# EAGLE board SparkFun_Thermocouple_Breakout-Panel (EAGLE 9.6.2), part 1 of 2
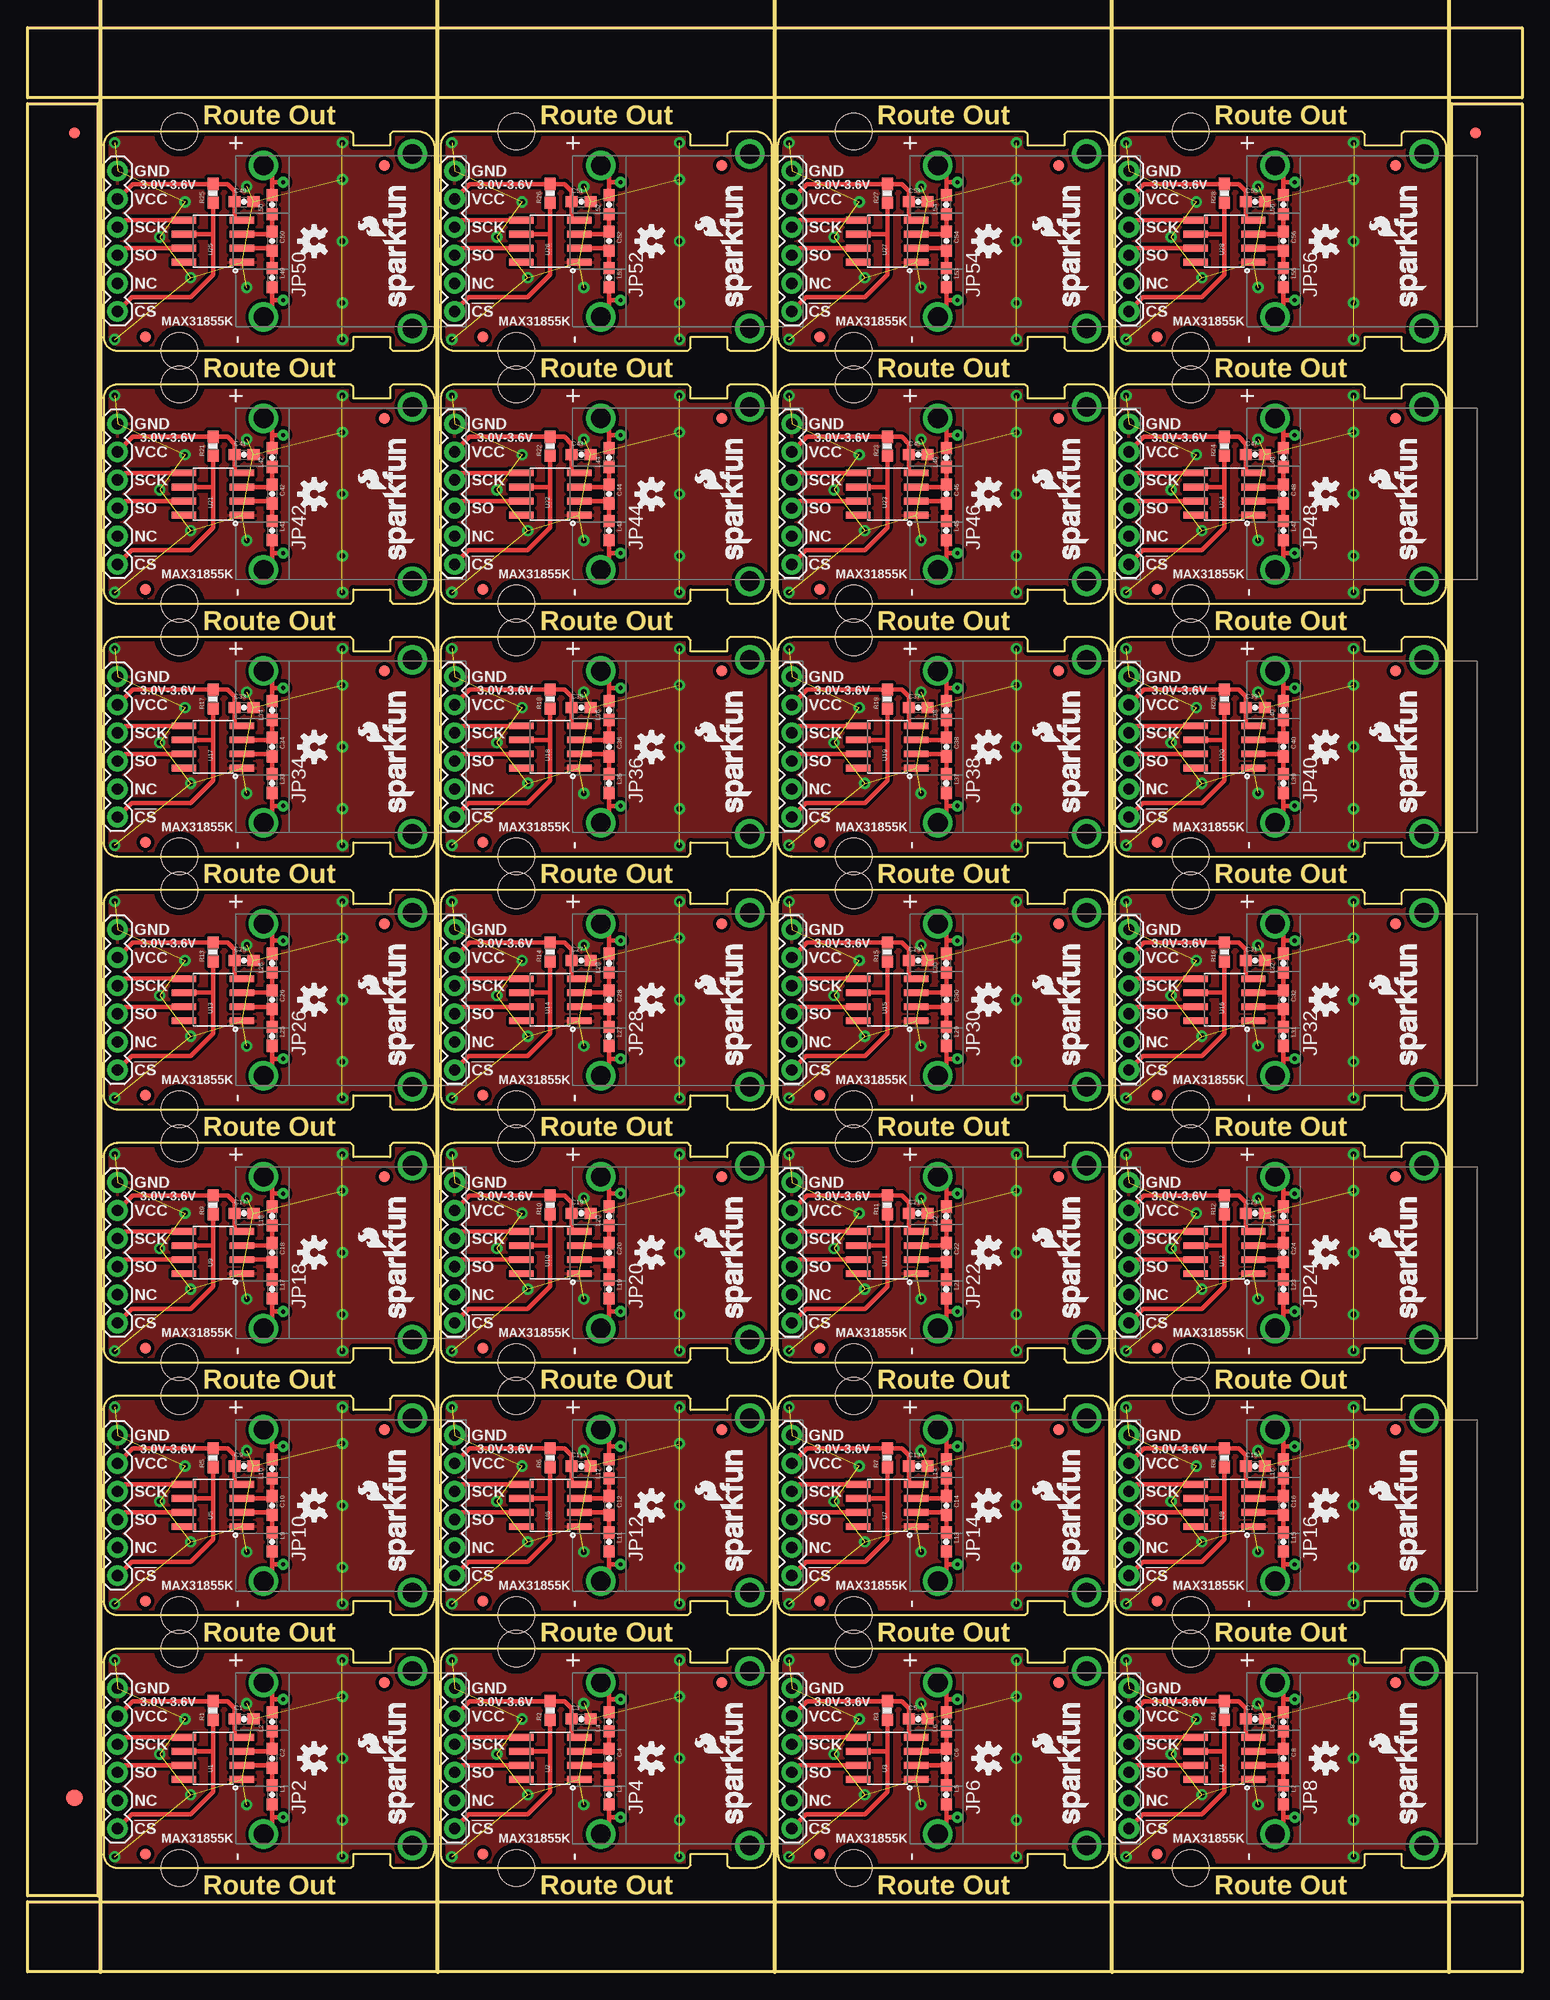
[diagram p0: board, top side]
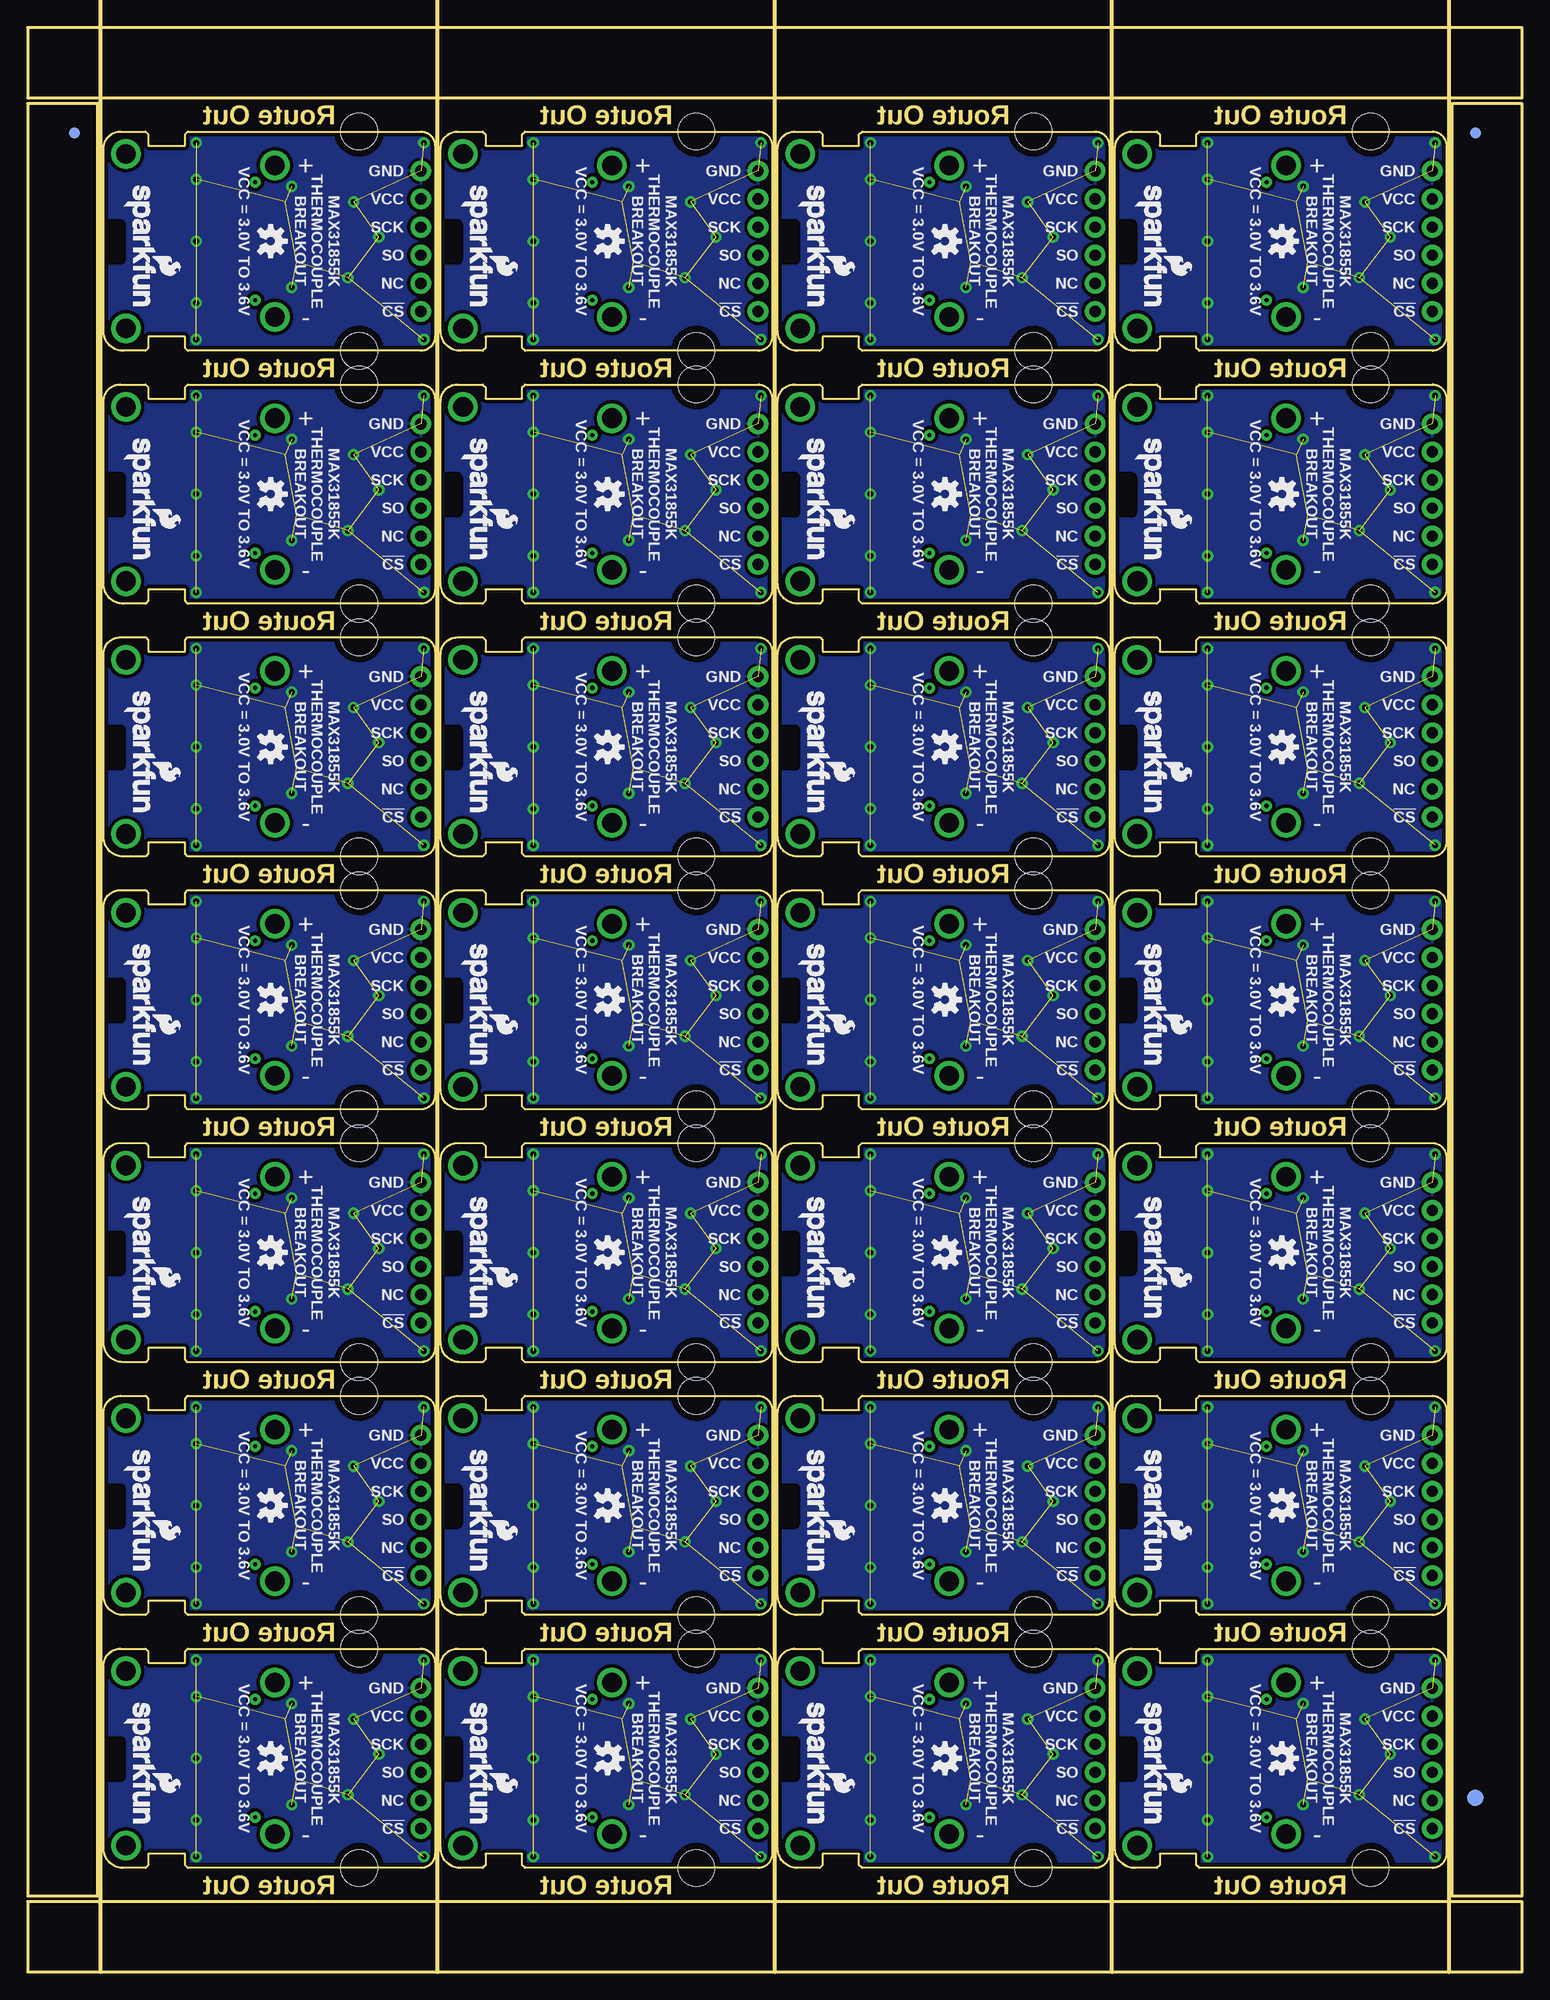
[diagram p1: board, bottom side, seen from below]

Size 135.13 x 175.77 mm. Coordinates in mm from the lower left corner, seen from the top.
Outline: 576 segments
Copper layers (1*16): Top 0.035mm / dielectric 1.5mm / Bottom 0.035mm
Design rules "SparkFun_Thermocouple_Breakout": minimum track width 7mil, minimum drill 15mil, track to track 8mil, track to pad 8mil, pad to pad 8mil, via to via 8mil, smd to smd 8mil, copper to edge 8mil, drill to drill 8mil, minimum pad ring 12mil, minimum via ring 10mil, stop-mask expansion 4mil, vias tented up to drill 20mil, thermal gap 10mil
tRestrict: area 19.6,17.8 to 20.1,18.3; area 50,17.8 to 50.5,18.3; area 80.5,17.8 to 81,18.3; area 111,17.8 to 111.5,18.3; area 19.6,40.6 to 20.1,41.1; area 50,40.6 to 50.5,41.1; area 80.5,40.6 to 81,41.1; area 111,40.6 to 111.5,41.1; area 19.6,63.5 to 20.1,64; area 50,63.5 to 50.5,64; area 80.5,63.5 to 81,64; area 111,63.5 to 111.5,64; 16 more areas
bRestrict: area 35.3,17.7 to 36.8,20.8; area 65.8,17.7 to 67.3,20.8; area 96.3,17.7 to 97.8,20.8; area 126.7,17.7 to 128.3,20.8; area 35.3,40.5 to 36.8,43.7; area 65.8,40.5 to 67.3,43.7; area 96.3,40.5 to 97.8,43.7; area 126.7,40.5 to 128.3,43.7; area 35.3,63.4 to 36.8,66.5; area 65.8,63.4 to 67.3,66.5; area 96.3,63.4 to 97.8,66.5; area 126.7,63.4 to 128.3,66.5; 16 more areas
Milling: 5 lines

## Footprints (pad centres in the part's own frame; a part is rotated, then mirrored left to right if it is on the bottom)
0603-CAP = smd 1.1 x 1: 1 -0.85,0; 2 0.85,0
FIDUCIAL-1X2 = smd 1 x 1: 1 0,0
FIDUCIAL-1.5X3 = smd 1.5 x 1.5: 1 0,0
1X06 = drill 1.016 pad 1.88: 1 0,0; 2 2.54,0; 3 5.08,0; 4 7.62,0; 5 10.16,0; 6 12.7,0
PCC-SMP = drill 1.778: + 6.858,0; - -6.858,0; CLIP1 -7.874,-13.462; CLIP2 7.874,-13.462
0603 = smd 1.1 x 1: 1 -0.85,0; 2 0.85,0
0603-RES = smd 1.1 x 1: 1 -0.85,0; 2 0.85,0
STAND-OFF = hole 3.302: 0,0
TP_15TH = drill 0.381 pad 0.61: P$1 0,0
SOIC8 = smd 0.61 x 2.21: 1 -1.905,-2.616; 2 -0.635,-2.616; 3 0.635,-2.616; 4 1.905,-2.616; 5 1.905,2.616; 6 0.635,2.616; 7 -0.635,2.616; 8 -1.905,2.616

## Placement (x,y rotation side)
C1  0.1uF  [0603-CAP]  19.56,22.86 0 top
C2  10nF  [0603-CAP]  22.1,19.3 270 top
C3  0.1uF  [0603-CAP]  50.04,22.86 0 top
C4  10nF  [0603-CAP]  52.58,19.3 270 top
C5  0.1uF  [0603-CAP]  80.52,22.86 0 top
C6  10nF  [0603-CAP]  83.06,19.3 270 top
C7  0.1uF  [0603-CAP]  111,22.86 0 top
C8  10nF  [0603-CAP]  113.54,19.3 270 top
C9  0.1uF  [0603-CAP]  19.56,45.72 0 top
C10  10nF  [0603-CAP]  22.1,42.16 270 top
C11  0.1uF  [0603-CAP]  50.04,45.72 0 top
C12  10nF  [0603-CAP]  52.58,42.16 270 top
C13  0.1uF  [0603-CAP]  80.52,45.72 0 top
C14  10nF  [0603-CAP]  83.06,42.16 270 top
C15  0.1uF  [0603-CAP]  111,45.72 0 top
C16  10nF  [0603-CAP]  113.54,42.16 270 top
C17  0.1uF  [0603-CAP]  19.56,68.58 0 top
C18  10nF  [0603-CAP]  22.1,65.02 270 top
C19  0.1uF  [0603-CAP]  50.04,68.58 0 top
C20  10nF  [0603-CAP]  52.58,65.02 270 top
C21  0.1uF  [0603-CAP]  80.52,68.58 0 top
C22  10nF  [0603-CAP]  83.06,65.02 270 top
C23  0.1uF  [0603-CAP]  111,68.58 0 top
C24  10nF  [0603-CAP]  113.54,65.02 270 top
C25  0.1uF  [0603-CAP]  19.56,91.44 0 top
C26  10nF  [0603-CAP]  22.1,87.88 270 top
C27  0.1uF  [0603-CAP]  50.04,91.44 0 top
C28  10nF  [0603-CAP]  52.58,87.88 270 top
C29  0.1uF  [0603-CAP]  80.52,91.44 0 top
C30  10nF  [0603-CAP]  83.06,87.88 270 top
C31  0.1uF  [0603-CAP]  111,91.44 0 top
C32  10nF  [0603-CAP]  113.54,87.88 270 top
C33  0.1uF  [0603-CAP]  19.56,114.3 0 top
C34  10nF  [0603-CAP]  22.1,110.74 270 top
C35  0.1uF  [0603-CAP]  50.04,114.3 0 top
C36  10nF  [0603-CAP]  52.58,110.74 270 top
C37  0.1uF  [0603-CAP]  80.52,114.3 0 top
C38  10nF  [0603-CAP]  83.06,110.74 270 top
C39  0.1uF  [0603-CAP]  111,114.3 0 top
C40  10nF  [0603-CAP]  113.54,110.74 270 top
C41  0.1uF  [0603-CAP]  19.56,137.16 0 top
C42  10nF  [0603-CAP]  22.1,133.6 270 top
C43  0.1uF  [0603-CAP]  50.04,137.16 0 top
C44  10nF  [0603-CAP]  52.58,133.6 270 top
C45  0.1uF  [0603-CAP]  80.52,137.16 0 top
C46  10nF  [0603-CAP]  83.06,133.6 270 top
C47  0.1uF  [0603-CAP]  111,137.16 0 top
C48  10nF  [0603-CAP]  113.54,133.6 270 top
C49  0.1uF  [0603-CAP]  19.56,160.02 0 top
C50  10nF  [0603-CAP]  22.1,156.46 270 top
C51  0.1uF  [0603-CAP]  50.04,160.02 0 top
C52  10nF  [0603-CAP]  52.58,156.46 270 top
C53  0.1uF  [0603-CAP]  80.52,160.02 0 top
C54  10nF  [0603-CAP]  83.06,156.46 270 top
C55  0.1uF  [0603-CAP]  111,160.02 0 top
C56  10nF  [0603-CAP]  113.54,156.46 270 top
E$1  [FIDUCIAL-1X2]  4.23,166.24 0 top
E$2  [FIDUCIAL-1X2]  4.23,166.24 0 bottom
E$3  [FIDUCIAL-1X2]  130.89,166.24 0 top
E$4  [FIDUCIAL-1X2]  130.89,166.24 0 bottom
E$5  [FIDUCIAL-1.5X3]  4.23,15.75 0 top
E$6  [FIDUCIAL-1.5X3]  4.23,15.75 0 bottom
FID1  FIDUCIAL1X2  [FIDUCIAL-1X2]  32.26,26.16 0 top
FID2  FIDUCIAL1X2  [FIDUCIAL-1X2]  10.67,10.67 0 top
FID3  FIDUCIAL1X2  [FIDUCIAL-1X2]  62.74,26.16 0 top
FID4  FIDUCIAL1X2  [FIDUCIAL-1X2]  41.15,10.67 0 top
FID5  FIDUCIAL1X2  [FIDUCIAL-1X2]  93.22,26.16 0 top
FID6  FIDUCIAL1X2  [FIDUCIAL-1X2]  71.63,10.67 0 top
FID7  FIDUCIAL1X2  [FIDUCIAL-1X2]  123.7,26.16 0 top
FID8  FIDUCIAL1X2  [FIDUCIAL-1X2]  102.11,10.67 0 top
FID9  FIDUCIAL1X2  [FIDUCIAL-1X2]  32.26,49.02 0 top
FID10  FIDUCIAL1X2  [FIDUCIAL-1X2]  10.67,33.53 0 top
FID11  FIDUCIAL1X2  [FIDUCIAL-1X2]  62.74,49.02 0 top
FID12  FIDUCIAL1X2  [FIDUCIAL-1X2]  41.15,33.53 0 top
FID13  FIDUCIAL1X2  [FIDUCIAL-1X2]  93.22,49.02 0 top
FID14  FIDUCIAL1X2  [FIDUCIAL-1X2]  71.63,33.53 0 top
FID15  FIDUCIAL1X2  [FIDUCIAL-1X2]  123.7,49.02 0 top
FID16  FIDUCIAL1X2  [FIDUCIAL-1X2]  102.11,33.53 0 top
FID17  FIDUCIAL1X2  [FIDUCIAL-1X2]  32.26,71.88 0 top
FID18  FIDUCIAL1X2  [FIDUCIAL-1X2]  10.67,56.39 0 top
FID19  FIDUCIAL1X2  [FIDUCIAL-1X2]  62.74,71.88 0 top
FID20  FIDUCIAL1X2  [FIDUCIAL-1X2]  41.15,56.39 0 top
FID21  FIDUCIAL1X2  [FIDUCIAL-1X2]  93.22,71.88 0 top
FID22  FIDUCIAL1X2  [FIDUCIAL-1X2]  71.63,56.39 0 top
FID23  FIDUCIAL1X2  [FIDUCIAL-1X2]  123.7,71.88 0 top
FID24  FIDUCIAL1X2  [FIDUCIAL-1X2]  102.11,56.39 0 top
FID25  FIDUCIAL1X2  [FIDUCIAL-1X2]  32.26,94.74 0 top
FID26  FIDUCIAL1X2  [FIDUCIAL-1X2]  10.67,79.25 0 top
FID27  FIDUCIAL1X2  [FIDUCIAL-1X2]  62.74,94.74 0 top
FID28  FIDUCIAL1X2  [FIDUCIAL-1X2]  41.15,79.25 0 top
FID29  FIDUCIAL1X2  [FIDUCIAL-1X2]  93.22,94.74 0 top
FID30  FIDUCIAL1X2  [FIDUCIAL-1X2]  71.63,79.25 0 top
FID31  FIDUCIAL1X2  [FIDUCIAL-1X2]  123.7,94.74 0 top
FID32  FIDUCIAL1X2  [FIDUCIAL-1X2]  102.11,79.25 0 top
FID33  FIDUCIAL1X2  [FIDUCIAL-1X2]  32.26,117.6 0 top
FID34  FIDUCIAL1X2  [FIDUCIAL-1X2]  10.67,102.11 0 top
FID35  FIDUCIAL1X2  [FIDUCIAL-1X2]  62.74,117.6 0 top
FID36  FIDUCIAL1X2  [FIDUCIAL-1X2]  41.15,102.11 0 top
FID37  FIDUCIAL1X2  [FIDUCIAL-1X2]  93.22,117.6 0 top
FID38  FIDUCIAL1X2  [FIDUCIAL-1X2]  71.63,102.11 0 top
FID39  FIDUCIAL1X2  [FIDUCIAL-1X2]  123.7,117.6 0 top
FID40  FIDUCIAL1X2  [FIDUCIAL-1X2]  102.11,102.11 0 top
FID41  FIDUCIAL1X2  [FIDUCIAL-1X2]  32.26,140.46 0 top
FID42  FIDUCIAL1X2  [FIDUCIAL-1X2]  10.67,124.97 0 top
FID43  FIDUCIAL1X2  [FIDUCIAL-1X2]  62.74,140.46 0 top
FID44  FIDUCIAL1X2  [FIDUCIAL-1X2]  41.15,124.97 0 top
FID45  FIDUCIAL1X2  [FIDUCIAL-1X2]  93.22,140.46 0 top
FID46  FIDUCIAL1X2  [FIDUCIAL-1X2]  71.63,124.97 0 top
FID47  FIDUCIAL1X2  [FIDUCIAL-1X2]  123.7,140.46 0 top
FID48  FIDUCIAL1X2  [FIDUCIAL-1X2]  102.11,124.97 0 top
FID49  FIDUCIAL1X2  [FIDUCIAL-1X2]  32.26,163.32 0 top
FID50  FIDUCIAL1X2  [FIDUCIAL-1X2]  10.67,147.83 0 top
FID51  FIDUCIAL1X2  [FIDUCIAL-1X2]  62.74,163.32 0 top
FID52  FIDUCIAL1X2  [FIDUCIAL-1X2]  41.15,147.83 0 top
FID53  FIDUCIAL1X2  [FIDUCIAL-1X2]  93.22,163.32 0 top
FID54  FIDUCIAL1X2  [FIDUCIAL-1X2]  71.63,147.83 0 top
FID55  FIDUCIAL1X2  [FIDUCIAL-1X2]  123.7,163.32 0 top
FID56  FIDUCIAL1X2  [FIDUCIAL-1X2]  102.11,147.83 0 top
JP1  DNP  [1X06]  8.13,25.65 270 top
JP2  PCB_THERMOCOUPLE  [PCC-SMP]  21.34,19.3 90 top
JP3  DNP  [1X06]  38.61,25.65 270 top
JP4  PCB_THERMOCOUPLE  [PCC-SMP]  51.82,19.3 90 top
JP5  DNP  [1X06]  69.09,25.65 270 top
JP6  PCB_THERMOCOUPLE  [PCC-SMP]  82.3,19.3 90 top
JP7  DNP  [1X06]  99.57,25.65 270 top
JP8  PCB_THERMOCOUPLE  [PCC-SMP]  112.78,19.3 90 top
JP9  DNP  [1X06]  8.13,48.51 270 top
JP10  PCB_THERMOCOUPLE  [PCC-SMP]  21.34,42.16 90 top
JP11  DNP  [1X06]  38.61,48.51 270 top
JP12  PCB_THERMOCOUPLE  [PCC-SMP]  51.82,42.16 90 top
JP13  DNP  [1X06]  69.09,48.51 270 top
JP14  PCB_THERMOCOUPLE  [PCC-SMP]  82.3,42.16 90 top
JP15  DNP  [1X06]  99.57,48.51 270 top
JP16  PCB_THERMOCOUPLE  [PCC-SMP]  112.78,42.16 90 top
JP17  DNP  [1X06]  8.13,71.37 270 top
JP18  PCB_THERMOCOUPLE  [PCC-SMP]  21.34,65.02 90 top
JP19  DNP  [1X06]  38.61,71.37 270 top
JP20  PCB_THERMOCOUPLE  [PCC-SMP]  51.82,65.02 90 top
JP21  DNP  [1X06]  69.09,71.37 270 top
JP22  PCB_THERMOCOUPLE  [PCC-SMP]  82.3,65.02 90 top
JP23  DNP  [1X06]  99.57,71.37 270 top
JP24  PCB_THERMOCOUPLE  [PCC-SMP]  112.78,65.02 90 top
JP25  DNP  [1X06]  8.13,94.23 270 top
JP26  PCB_THERMOCOUPLE  [PCC-SMP]  21.34,87.88 90 top
JP27  DNP  [1X06]  38.61,94.23 270 top
JP28  PCB_THERMOCOUPLE  [PCC-SMP]  51.82,87.88 90 top
JP29  DNP  [1X06]  69.09,94.23 270 top
JP30  PCB_THERMOCOUPLE  [PCC-SMP]  82.3,87.88 90 top
JP31  DNP  [1X06]  99.57,94.23 270 top
JP32  PCB_THERMOCOUPLE  [PCC-SMP]  112.78,87.88 90 top
JP33  DNP  [1X06]  8.13,117.09 270 top
JP34  PCB_THERMOCOUPLE  [PCC-SMP]  21.34,110.74 90 top
JP35  DNP  [1X06]  38.61,117.09 270 top
JP36  PCB_THERMOCOUPLE  [PCC-SMP]  51.82,110.74 90 top
JP37  DNP  [1X06]  69.09,117.09 270 top
JP38  PCB_THERMOCOUPLE  [PCC-SMP]  82.3,110.74 90 top
JP39  DNP  [1X06]  99.57,117.09 270 top
JP40  PCB_THERMOCOUPLE  [PCC-SMP]  112.78,110.74 90 top
JP41  DNP  [1X06]  8.13,139.95 270 top
JP42  PCB_THERMOCOUPLE  [PCC-SMP]  21.34,133.6 90 top
JP43  DNP  [1X06]  38.61,139.95 270 top
JP44  PCB_THERMOCOUPLE  [PCC-SMP]  51.82,133.6 90 top
JP45  DNP  [1X06]  69.09,139.95 270 top
JP46  PCB_THERMOCOUPLE  [PCC-SMP]  82.3,133.6 90 top
JP47  DNP  [1X06]  99.57,139.95 270 top
JP48  PCB_THERMOCOUPLE  [PCC-SMP]  112.78,133.6 90 top
JP49  DNP  [1X06]  8.13,162.81 270 top
JP50  PCB_THERMOCOUPLE  [PCC-SMP]  21.34,156.46 90 top
JP51  DNP  [1X06]  38.61,162.81 270 top
JP52  PCB_THERMOCOUPLE  [PCC-SMP]  51.82,156.46 90 top
JP53  DNP  [1X06]  69.09,162.81 270 top
JP54  PCB_THERMOCOUPLE  [PCC-SMP]  82.3,156.46 90 top
JP55  DNP  [1X06]  99.57,162.81 270 top
JP56  PCB_THERMOCOUPLE  [PCC-SMP]  112.78,156.46 90 top
L1  470OHM  [0603]  22.1,16 270 top
L2  470OHM  [0603]  22.1,22.61 90 top
L3  470OHM  [0603]  52.58,16 270 top
L4  470OHM  [0603]  52.58,22.61 90 top
L5  470OHM  [0603]  83.06,16 270 top
L6  470OHM  [0603]  83.06,22.61 90 top
L7  470OHM  [0603]  113.54,16 270 top
L8  470OHM  [0603]  113.54,22.61 90 top
L9  470OHM  [0603]  22.1,38.86 270 top
L10  470OHM  [0603]  22.1,45.47 90 top
L11  470OHM  [0603]  52.58,38.86 270 top
L12  470OHM  [0603]  52.58,45.47 90 top
L13  470OHM  [0603]  83.06,38.86 270 top
L14  470OHM  [0603]  83.06,45.47 90 top
L15  470OHM  [0603]  113.54,38.86 270 top
L16  470OHM  [0603]  113.54,45.47 90 top
L17  470OHM  [0603]  22.1,61.72 270 top
L18  470OHM  [0603]  22.1,68.33 90 top
L19  470OHM  [0603]  52.58,61.72 270 top
L20  470OHM  [0603]  52.58,68.33 90 top
L21  470OHM  [0603]  83.06,61.72 270 top
L22  470OHM  [0603]  83.06,68.33 90 top
L23  470OHM  [0603]  113.54,61.72 270 top
L24  470OHM  [0603]  113.54,68.33 90 top
L25  470OHM  [0603]  22.1,84.58 270 top
L26  470OHM  [0603]  22.1,91.19 90 top
L27  470OHM  [0603]  52.58,84.58 270 top
L28  470OHM  [0603]  52.58,91.19 90 top
L29  470OHM  [0603]  83.06,84.58 270 top
L30  470OHM  [0603]  83.06,91.19 90 top
L31  470OHM  [0603]  113.54,84.58 270 top
L32  470OHM  [0603]  113.54,91.19 90 top
L33  470OHM  [0603]  22.1,107.44 270 top
L34  470OHM  [0603]  22.1,114.05 90 top
L35  470OHM  [0603]  52.58,107.44 270 top
L36  470OHM  [0603]  52.58,114.05 90 top
L37  470OHM  [0603]  83.06,107.44 270 top
L38  470OHM  [0603]  83.06,114.05 90 top
L39  470OHM  [0603]  113.54,107.44 270 top
L40  470OHM  [0603]  113.54,114.05 90 top
L41  470OHM  [0603]  22.1,130.3 270 top
L42  470OHM  [0603]  22.1,136.91 90 top
L43  470OHM  [0603]  52.58,130.3 270 top
L44  470OHM  [0603]  52.58,136.91 90 top
L45  470OHM  [0603]  83.06,130.3 270 top
L46  470OHM  [0603]  83.06,136.91 90 top
L47  470OHM  [0603]  113.54,130.3 270 top
L48  470OHM  [0603]  113.54,136.91 90 top
L49  470OHM  [0603]  22.1,153.16 270 top
L50  470OHM  [0603]  22.1,159.77 90 top
L51  470OHM  [0603]  52.58,153.16 270 top
L52  470OHM  [0603]  52.58,159.77 90 top
L53  470OHM  [0603]  83.06,153.16 270 top
L54  470OHM  [0603]  83.06,159.77 90 top
L55  470OHM  [0603]  113.54,153.16 270 top
L56  470OHM  [0603]  113.54,159.77 90 top
LOGO1  OSHW-LOGOS  [OSHW-LOGO-S]  25.91,19.3 90 top
LOGO2  SFE_LOGO_NAME_FLAME.1_INCH  [SFE_LOGO_NAME_FLAME_.1]  35.05,12.95 90 top
LOGO3  SFE_LOGO_NAME_FLAME.1_INCH  [SFE_LOGO_NAME_FLAME_.1]  35.05,24.77 270 bottom
LOGO4  OSHW-LOGOS  [OSHW-LOGO-S]  21.72,19.3 270 bottom
LOGO5  SFE_LOGO_NAME_FLAME.1_INCH  [SFE_LOGO_NAME_FLAME_.1]  65.53,12.95 90 top
LOGO6  OSHW-LOGOS  [OSHW-LOGO-S]  56.39,19.3 90 top
LOGO7  SFE_LOGO_NAME_FLAME.1_INCH  [SFE_LOGO_NAME_FLAME_.1]  65.53,24.77 270 bottom
LOGO8  OSHW-LOGOS  [OSHW-LOGO-S]  52.2,19.3 270 bottom
LOGO9  SFE_LOGO_NAME_FLAME.1_INCH  [SFE_LOGO_NAME_FLAME_.1]  96.01,12.95 90 top
LOGO10  OSHW-LOGOS  [OSHW-LOGO-S]  86.87,19.3 90 top
LOGO11  SFE_LOGO_NAME_FLAME.1_INCH  [SFE_LOGO_NAME_FLAME_.1]  96.01,24.77 270 bottom
LOGO12  OSHW-LOGOS  [OSHW-LOGO-S]  82.68,19.3 270 bottom
LOGO13  SFE_LOGO_NAME_FLAME.1_INCH  [SFE_LOGO_NAME_FLAME_.1]  126.49,12.95 90 top
LOGO14  OSHW-LOGOS  [OSHW-LOGO-S]  117.35,19.3 90 top
LOGO15  SFE_LOGO_NAME_FLAME.1_INCH  [SFE_LOGO_NAME_FLAME_.1]  126.49,24.77 270 bottom
LOGO16  OSHW-LOGOS  [OSHW-LOGO-S]  113.16,19.3 270 bottom
LOGO17  SFE_LOGO_NAME_FLAME.1_INCH  [SFE_LOGO_NAME_FLAME_.1]  35.05,35.81 90 top
LOGO18  OSHW-LOGOS  [OSHW-LOGO-S]  25.91,42.16 90 top
LOGO19  SFE_LOGO_NAME_FLAME.1_INCH  [SFE_LOGO_NAME_FLAME_.1]  35.05,47.62 270 bottom
LOGO20  OSHW-LOGOS  [OSHW-LOGO-S]  21.72,42.16 270 bottom
LOGO21  SFE_LOGO_NAME_FLAME.1_INCH  [SFE_LOGO_NAME_FLAME_.1]  65.53,35.81 90 top
LOGO22  OSHW-LOGOS  [OSHW-LOGO-S]  56.39,42.16 90 top
LOGO23  SFE_LOGO_NAME_FLAME.1_INCH  [SFE_LOGO_NAME_FLAME_.1]  65.53,47.62 270 bottom
LOGO24  OSHW-LOGOS  [OSHW-LOGO-S]  52.2,42.16 270 bottom
LOGO25  SFE_LOGO_NAME_FLAME.1_INCH  [SFE_LOGO_NAME_FLAME_.1]  96.01,35.81 90 top
LOGO26  OSHW-LOGOS  [OSHW-LOGO-S]  86.87,42.16 90 top
LOGO27  SFE_LOGO_NAME_FLAME.1_INCH  [SFE_LOGO_NAME_FLAME_.1]  96.01,47.62 270 bottom
LOGO28  OSHW-LOGOS  [OSHW-LOGO-S]  82.68,42.16 270 bottom
LOGO29  SFE_LOGO_NAME_FLAME.1_INCH  [SFE_LOGO_NAME_FLAME_.1]  126.49,35.81 90 top
LOGO30  OSHW-LOGOS  [OSHW-LOGO-S]  117.35,42.16 90 top
LOGO31  SFE_LOGO_NAME_FLAME.1_INCH  [SFE_LOGO_NAME_FLAME_.1]  126.49,47.62 270 bottom
LOGO32  OSHW-LOGOS  [OSHW-LOGO-S]  113.16,42.16 270 bottom
LOGO33  SFE_LOGO_NAME_FLAME.1_INCH  [SFE_LOGO_NAME_FLAME_.1]  35.05,58.67 90 top
LOGO34  OSHW-LOGOS  [OSHW-LOGO-S]  25.91,65.02 90 top
LOGO35  SFE_LOGO_NAME_FLAME.1_INCH  [SFE_LOGO_NAME_FLAME_.1]  35.05,70.48 270 bottom
LOGO36  OSHW-LOGOS  [OSHW-LOGO-S]  21.72,65.02 270 bottom
LOGO37  SFE_LOGO_NAME_FLAME.1_INCH  [SFE_LOGO_NAME_FLAME_.1]  65.53,58.67 90 top
LOGO38  OSHW-LOGOS  [OSHW-LOGO-S]  56.39,65.02 90 top
LOGO39  SFE_LOGO_NAME_FLAME.1_INCH  [SFE_LOGO_NAME_FLAME_.1]  65.53,70.48 270 bottom
LOGO40  OSHW-LOGOS  [OSHW-LOGO-S]  52.2,65.02 270 bottom
LOGO41  SFE_LOGO_NAME_FLAME.1_INCH  [SFE_LOGO_NAME_FLAME_.1]  96.01,58.67 90 top
LOGO42  OSHW-LOGOS  [OSHW-LOGO-S]  86.87,65.02 90 top
LOGO43  SFE_LOGO_NAME_FLAME.1_INCH  [SFE_LOGO_NAME_FLAME_.1]  96.01,70.48 270 bottom
LOGO44  OSHW-LOGOS  [OSHW-LOGO-S]  82.68,65.02 270 bottom
LOGO45  SFE_LOGO_NAME_FLAME.1_INCH  [SFE_LOGO_NAME_FLAME_.1]  126.49,58.67 90 top
LOGO46  OSHW-LOGOS  [OSHW-LOGO-S]  117.35,65.02 90 top
LOGO47  SFE_LOGO_NAME_FLAME.1_INCH  [SFE_LOGO_NAME_FLAME_.1]  126.49,70.48 270 bottom
LOGO48  OSHW-LOGOS  [OSHW-LOGO-S]  113.16,65.02 270 bottom
LOGO49  SFE_LOGO_NAME_FLAME.1_INCH  [SFE_LOGO_NAME_FLAME_.1]  35.05,81.53 90 top
LOGO50  OSHW-LOGOS  [OSHW-LOGO-S]  25.91,87.88 90 top
LOGO51  SFE_LOGO_NAME_FLAME.1_INCH  [SFE_LOGO_NAME_FLAME_.1]  35.05,93.34 270 bottom
LOGO52  OSHW-LOGOS  [OSHW-LOGO-S]  21.72,87.88 270 bottom
LOGO53  SFE_LOGO_NAME_FLAME.1_INCH  [SFE_LOGO_NAME_FLAME_.1]  65.53,81.53 90 top
LOGO54  OSHW-LOGOS  [OSHW-LOGO-S]  56.39,87.88 90 top
LOGO55  SFE_LOGO_NAME_FLAME.1_INCH  [SFE_LOGO_NAME_FLAME_.1]  65.53,93.34 270 bottom
LOGO56  OSHW-LOGOS  [OSHW-LOGO-S]  52.2,87.88 270 bottom
LOGO57  SFE_LOGO_NAME_FLAME.1_INCH  [SFE_LOGO_NAME_FLAME_.1]  96.01,81.53 90 top
LOGO58  OSHW-LOGOS  [OSHW-LOGO-S]  86.87,87.88 90 top
LOGO59  SFE_LOGO_NAME_FLAME.1_INCH  [SFE_LOGO_NAME_FLAME_.1]  96.01,93.34 270 bottom
LOGO60  OSHW-LOGOS  [OSHW-LOGO-S]  82.68,87.88 270 bottom
LOGO61  SFE_LOGO_NAME_FLAME.1_INCH  [SFE_LOGO_NAME_FLAME_.1]  126.49,81.53 90 top
LOGO62  OSHW-LOGOS  [OSHW-LOGO-S]  117.35,87.88 90 top
LOGO63  SFE_LOGO_NAME_FLAME.1_INCH  [SFE_LOGO_NAME_FLAME_.1]  126.49,93.34 270 bottom
LOGO64  OSHW-LOGOS  [OSHW-LOGO-S]  113.16,87.88 270 bottom
LOGO65  SFE_LOGO_NAME_FLAME.1_INCH  [SFE_LOGO_NAME_FLAME_.1]  35.05,104.39 90 top
LOGO66  OSHW-LOGOS  [OSHW-LOGO-S]  25.91,110.74 90 top
LOGO67  SFE_LOGO_NAME_FLAME.1_INCH  [SFE_LOGO_NAME_FLAME_.1]  35.05,116.2 270 bottom
LOGO68  OSHW-LOGOS  [OSHW-LOGO-S]  21.72,110.74 270 bottom
LOGO69  SFE_LOGO_NAME_FLAME.1_INCH  [SFE_LOGO_NAME_FLAME_.1]  65.53,104.39 90 top
LOGO70  OSHW-LOGOS  [OSHW-LOGO-S]  56.39,110.74 90 top
LOGO71  SFE_LOGO_NAME_FLAME.1_INCH  [SFE_LOGO_NAME_FLAME_.1]  65.53,116.2 270 bottom
LOGO72  OSHW-LOGOS  [OSHW-LOGO-S]  52.2,110.74 270 bottom
LOGO73  SFE_LOGO_NAME_FLAME.1_INCH  [SFE_LOGO_NAME_FLAME_.1]  96.01,104.39 90 top
LOGO74  OSHW-LOGOS  [OSHW-LOGO-S]  86.87,110.74 90 top
LOGO75  SFE_LOGO_NAME_FLAME.1_INCH  [SFE_LOGO_NAME_FLAME_.1]  96.01,116.2 270 bottom
LOGO76  OSHW-LOGOS  [OSHW-LOGO-S]  82.68,110.74 270 bottom
LOGO77  SFE_LOGO_NAME_FLAME.1_INCH  [SFE_LOGO_NAME_FLAME_.1]  126.49,104.39 90 top
LOGO78  OSHW-LOGOS  [OSHW-LOGO-S]  117.35,110.74 90 top
LOGO79  SFE_LOGO_NAME_FLAME.1_INCH  [SFE_LOGO_NAME_FLAME_.1]  126.49,116.2 270 bottom
LOGO80  OSHW-LOGOS  [OSHW-LOGO-S]  113.16,110.74 270 bottom
LOGO81  SFE_LOGO_NAME_FLAME.1_INCH  [SFE_LOGO_NAME_FLAME_.1]  35.05,127.25 90 top
LOGO82  OSHW-LOGOS  [OSHW-LOGO-S]  25.91,133.6 90 top
LOGO83  SFE_LOGO_NAME_FLAME.1_INCH  [SFE_LOGO_NAME_FLAME_.1]  35.05,139.06 270 bottom
LOGO84  OSHW-LOGOS  [OSHW-LOGO-S]  21.72,133.6 270 bottom
LOGO85  SFE_LOGO_NAME_FLAME.1_INCH  [SFE_LOGO_NAME_FLAME_.1]  65.53,127.25 90 top
LOGO86  OSHW-LOGOS  [OSHW-LOGO-S]  56.39,133.6 90 top
LOGO87  SFE_LOGO_NAME_FLAME.1_INCH  [SFE_LOGO_NAME_FLAME_.1]  65.53,139.06 270 bottom
LOGO88  OSHW-LOGOS  [OSHW-LOGO-S]  52.2,133.6 270 bottom
LOGO89  SFE_LOGO_NAME_FLAME.1_INCH  [SFE_LOGO_NAME_FLAME_.1]  96.01,127.25 90 top
LOGO90  OSHW-LOGOS  [OSHW-LOGO-S]  86.87,133.6 90 top
LOGO91  SFE_LOGO_NAME_FLAME.1_INCH  [SFE_LOGO_NAME_FLAME_.1]  96.01,139.06 270 bottom
LOGO92  OSHW-LOGOS  [OSHW-LOGO-S]  82.68,133.6 270 bottom
LOGO93  SFE_LOGO_NAME_FLAME.1_INCH  [SFE_LOGO_NAME_FLAME_.1]  126.49,127.25 90 top
LOGO94  OSHW-LOGOS  [OSHW-LOGO-S]  117.35,133.6 90 top
LOGO95  SFE_LOGO_NAME_FLAME.1_INCH  [SFE_LOGO_NAME_FLAME_.1]  126.49,139.06 270 bottom
LOGO96  OSHW-LOGOS  [OSHW-LOGO-S]  113.16,133.6 270 bottom
LOGO97  SFE_LOGO_NAME_FLAME.1_INCH  [SFE_LOGO_NAME_FLAME_.1]  35.05,150.11 90 top
LOGO98  OSHW-LOGOS  [OSHW-LOGO-S]  25.91,156.46 90 top
LOGO99  SFE_LOGO_NAME_FLAME.1_INCH  [SFE_LOGO_NAME_FLAME_.1]  35.05,161.92 270 bottom
LOGO100  OSHW-LOGOS  [OSHW-LOGO-S]  21.72,156.46 270 bottom
LOGO101  SFE_LOGO_NAME_FLAME.1_INCH  [SFE_LOGO_NAME_FLAME_.1]  65.53,150.11 90 top
LOGO102  OSHW-LOGOS  [OSHW-LOGO-S]  56.39,156.46 90 top
LOGO103  SFE_LOGO_NAME_FLAME.1_INCH  [SFE_LOGO_NAME_FLAME_.1]  65.53,161.92 270 bottom
LOGO104  OSHW-LOGOS  [OSHW-LOGO-S]  52.2,156.46 270 bottom
LOGO105  SFE_LOGO_NAME_FLAME.1_INCH  [SFE_LOGO_NAME_FLAME_.1]  96.01,150.11 90 top
LOGO106  OSHW-LOGOS  [OSHW-LOGO-S]  86.87,156.46 90 top
LOGO107  SFE_LOGO_NAME_FLAME.1_INCH  [SFE_LOGO_NAME_FLAME_.1]  96.01,161.92 270 bottom
LOGO108  OSHW-LOGOS  [OSHW-LOGO-S]  82.68,156.46 270 bottom
LOGO109  SFE_LOGO_NAME_FLAME.1_INCH  [SFE_LOGO_NAME_FLAME_.1]  126.49,150.11 90 top
LOGO110  OSHW-LOGOS  [OSHW-LOGO-S]  117.35,156.46 90 top
LOGO111  SFE_LOGO_NAME_FLAME.1_INCH  [SFE_LOGO_NAME_FLAME_.1]  126.49,161.92 270 bottom
LOGO112  OSHW-LOGOS  [OSHW-LOGO-S]  113.16,156.46 270 bottom
R1  10K  [0603-RES]  16.76,23.62 90 top
R2  10K  [0603-RES]  47.24,23.62 90 top
R3  10K  [0603-RES]  77.72,23.62 90 top
R4  10K  [0603-RES]  108.2,23.62 90 top
R5  10K  [0603-RES]  16.76,46.48 90 top
R6  10K  [0603-RES]  47.24,46.48 90 top
R7  10K  [0603-RES]  77.72,46.48 90 top
R8  10K  [0603-RES]  108.2,46.48 90 top
R9  10K  [0603-RES]  16.76,69.34 90 top
R10  10K  [0603-RES]  47.24,69.34 90 top
R11  10K  [0603-RES]  77.72,69.34 90 top
R12  10K  [0603-RES]  108.2,69.34 90 top
R13  10K  [0603-RES]  16.76,92.2 90 top
R14  10K  [0603-RES]  47.24,92.2 90 top
R15  10K  [0603-RES]  77.72,92.2 90 top
R16  10K  [0603-RES]  108.2,92.2 90 top
R17  10K  [0603-RES]  16.76,115.06 90 top
R18  10K  [0603-RES]  47.24,115.06 90 top
R19  10K  [0603-RES]  77.72,115.06 90 top
R20  10K  [0603-RES]  108.2,115.06 90 top
R21  10K  [0603-RES]  16.76,137.92 90 top
R22  10K  [0603-RES]  47.24,137.92 90 top
R23  10K  [0603-RES]  77.72,137.92 90 top
R24  10K  [0603-RES]  108.2,137.92 90 top
R25  10K  [0603-RES]  16.76,160.78 90 top
R26  10K  [0603-RES]  47.24,160.78 90 top
R27  10K  [0603-RES]  77.72,160.78 90 top
R28  10K  [0603-RES]  108.2,160.78 90 top
STANDOFF1  STAND-OFF  [STAND-OFF]  13.72,9.4 0 top
STANDOFF2  STAND-OFF  [STAND-OFF]  44.2,29.21 0 top
STANDOFF3  STAND-OFF  [STAND-OFF]  44.2,9.4 0 top
STANDOFF4  STAND-OFF  [STAND-OFF]  13.72,29.21 0 top
STANDOFF5  STAND-OFF  [STAND-OFF]  74.68,29.21 0 top
STANDOFF6  STAND-OFF  [STAND-OFF]  74.68,9.4 0 top
STANDOFF7  STAND-OFF  [STAND-OFF]  105.16,29.21 0 top
STANDOFF8  STAND-OFF  [STAND-OFF]  105.16,9.4 0 top
STANDOFF9  STAND-OFF  [STAND-OFF]  13.72,52.07 0 top
STANDOFF10  STAND-OFF  [STAND-OFF]  13.72,32.26 0 top
STANDOFF11  STAND-OFF  [STAND-OFF]  44.2,52.07 0 top
STANDOFF12  STAND-OFF  [STAND-OFF]  44.2,32.26 0 top
STANDOFF13  STAND-OFF  [STAND-OFF]  74.68,52.07 0 top
STANDOFF14  STAND-OFF  [STAND-OFF]  74.68,32.26 0 top
STANDOFF15  STAND-OFF  [STAND-OFF]  105.16,52.07 0 top
STANDOFF16  STAND-OFF  [STAND-OFF]  105.16,32.26 0 top
STANDOFF17  STAND-OFF  [STAND-OFF]  13.72,74.93 0 top
STANDOFF18  STAND-OFF  [STAND-OFF]  13.72,55.12 0 top
STANDOFF19  STAND-OFF  [STAND-OFF]  44.2,74.93 0 top
STANDOFF20  STAND-OFF  [STAND-OFF]  44.2,55.12 0 top
STANDOFF21  STAND-OFF  [STAND-OFF]  74.68,74.93 0 top
STANDOFF22  STAND-OFF  [STAND-OFF]  74.68,55.12 0 top
STANDOFF23  STAND-OFF  [STAND-OFF]  105.16,74.93 0 top
STANDOFF24  STAND-OFF  [STAND-OFF]  105.16,55.12 0 top
STANDOFF25  STAND-OFF  [STAND-OFF]  13.72,97.79 0 top
STANDOFF26  STAND-OFF  [STAND-OFF]  13.72,77.98 0 top
STANDOFF27  STAND-OFF  [STAND-OFF]  44.2,97.79 0 top
STANDOFF28  STAND-OFF  [STAND-OFF]  44.2,77.98 0 top
STANDOFF29  STAND-OFF  [STAND-OFF]  74.68,97.79 0 top
STANDOFF30  STAND-OFF  [STAND-OFF]  74.68,77.98 0 top
STANDOFF31  STAND-OFF  [STAND-OFF]  105.16,97.79 0 top
STANDOFF32  STAND-OFF  [STAND-OFF]  105.16,77.98 0 top
STANDOFF33  STAND-OFF  [STAND-OFF]  13.72,120.65 0 top
STANDOFF34  STAND-OFF  [STAND-OFF]  13.72,100.84 0 top
STANDOFF35  STAND-OFF  [STAND-OFF]  44.2,120.65 0 top
STANDOFF36  STAND-OFF  [STAND-OFF]  44.2,100.84 0 top
STANDOFF37  STAND-OFF  [STAND-OFF]  74.68,120.65 0 top
STANDOFF38  STAND-OFF  [STAND-OFF]  74.68,100.84 0 top
STANDOFF39  STAND-OFF  [STAND-OFF]  105.16,120.65 0 top
STANDOFF40  STAND-OFF  [STAND-OFF]  105.16,100.84 0 top
STANDOFF41  STAND-OFF  [STAND-OFF]  13.72,143.51 0 top
STANDOFF42  STAND-OFF  [STAND-OFF]  13.72,123.7 0 top
STANDOFF43  STAND-OFF  [STAND-OFF]  44.2,143.51 0 top
STANDOFF44  STAND-OFF  [STAND-OFF]  44.2,123.7 0 top
STANDOFF45  STAND-OFF  [STAND-OFF]  74.68,143.51 0 top
STANDOFF46  STAND-OFF  [STAND-OFF]  74.68,123.7 0 top
STANDOFF47  STAND-OFF  [STAND-OFF]  105.16,143.51 0 top
STANDOFF48  STAND-OFF  [STAND-OFF]  105.16,123.7 0 top
STANDOFF49  STAND-OFF  [STAND-OFF]  13.72,166.37 0 top
STANDOFF50  STAND-OFF  [STAND-OFF]  13.72,146.56 0 top
STANDOFF51  STAND-OFF  [STAND-OFF]  44.2,166.37 0 top
STANDOFF52  STAND-OFF  [STAND-OFF]  44.2,146.56 0 top
STANDOFF53  STAND-OFF  [STAND-OFF]  74.68,166.37 0 top
STANDOFF54  STAND-OFF  [STAND-OFF]  74.68,146.56 0 top
STANDOFF55  STAND-OFF  [STAND-OFF]  105.16,166.37 0 top
STANDOFF56  STAND-OFF  [STAND-OFF]  105.16,146.56 0 top
TP1  TEST-POINTTP_15TH_THRU  [TP_15TH]  23.11,24.64 0 top
TP2  TEST-POINTTP_15TH_THRU  [TP_15TH]  23.11,13.97 0 top
TP3  TEST-POINTTP_15TH_THRU  [TP_15TH]  53.59,24.64 0 top
TP4  TEST-POINTTP_15TH_THRU  [TP_15TH]  53.59,13.97 0 top
TP5  TEST-POINTTP_15TH_THRU  [TP_15TH]  84.07,24.64 0 top
TP6  TEST-POINTTP_15TH_THRU  [TP_15TH]  84.07,13.97 0 top
TP7  TEST-POINTTP_15TH_THRU  [TP_15TH]  114.55,24.64 0 top
TP8  TEST-POINTTP_15TH_THRU  [TP_15TH]  114.55,13.97 0 top
TP9  TEST-POINTTP_15TH_THRU  [TP_15TH]  23.11,47.5 0 top
TP10  TEST-POINTTP_15TH_THRU  [TP_15TH]  23.11,36.83 0 top
TP11  TEST-POINTTP_15TH_THRU  [TP_15TH]  53.59,47.5 0 top
TP12  TEST-POINTTP_15TH_THRU  [TP_15TH]  53.59,36.83 0 top
TP13  TEST-POINTTP_15TH_THRU  [TP_15TH]  84.07,47.5 0 top
TP14  TEST-POINTTP_15TH_THRU  [TP_15TH]  84.07,36.83 0 top
TP15  TEST-POINTTP_15TH_THRU  [TP_15TH]  114.55,47.5 0 top
TP16  TEST-POINTTP_15TH_THRU  [TP_15TH]  114.55,36.83 0 top
TP17  TEST-POINTTP_15TH_THRU  [TP_15TH]  23.11,70.36 0 top
TP18  TEST-POINTTP_15TH_THRU  [TP_15TH]  23.11,59.69 0 top
TP19  TEST-POINTTP_15TH_THRU  [TP_15TH]  53.59,70.36 0 top
TP20  TEST-POINTTP_15TH_THRU  [TP_15TH]  53.59,59.69 0 top
TP21  TEST-POINTTP_15TH_THRU  [TP_15TH]  84.07,70.36 0 top
TP22  TEST-POINTTP_15TH_THRU  [TP_15TH]  84.07,59.69 0 top
TP23  TEST-POINTTP_15TH_THRU  [TP_15TH]  114.55,70.36 0 top
TP24  TEST-POINTTP_15TH_THRU  [TP_15TH]  114.55,59.69 0 top
TP25  TEST-POINTTP_15TH_THRU  [TP_15TH]  23.11,93.22 0 top
TP26  TEST-POINTTP_15TH_THRU  [TP_15TH]  23.11,82.55 0 top
TP27  TEST-POINTTP_15TH_THRU  [TP_15TH]  53.59,93.22 0 top
TP28  TEST-POINTTP_15TH_THRU  [TP_15TH]  53.59,82.55 0 top
TP29  TEST-POINTTP_15TH_THRU  [TP_15TH]  84.07,93.22 0 top
TP30  TEST-POINTTP_15TH_THRU  [TP_15TH]  84.07,82.55 0 top
TP31  TEST-POINTTP_15TH_THRU  [TP_15TH]  114.55,93.22 0 top
TP32  TEST-POINTTP_15TH_THRU  [TP_15TH]  114.55,82.55 0 top
TP33  TEST-POINTTP_15TH_THRU  [TP_15TH]  23.11,116.08 0 top
TP34  TEST-POINTTP_15TH_THRU  [TP_15TH]  23.11,105.41 0 top
TP35  TEST-POINTTP_15TH_THRU  [TP_15TH]  53.59,116.08 0 top
TP36  TEST-POINTTP_15TH_THRU  [TP_15TH]  53.59,105.41 0 top
TP37  TEST-POINTTP_15TH_THRU  [TP_15TH]  84.07,116.08 0 top
TP38  TEST-POINTTP_15TH_THRU  [TP_15TH]  84.07,105.41 0 top
TP39  TEST-POINTTP_15TH_THRU  [TP_15TH]  114.55,116.08 0 top
TP40  TEST-POINTTP_15TH_THRU  [TP_15TH]  114.55,105.41 0 top
TP41  TEST-POINTTP_15TH_THRU  [TP_15TH]  23.11,138.94 0 top
TP42  TEST-POINTTP_15TH_THRU  [TP_15TH]  23.11,128.27 0 top
TP43  TEST-POINTTP_15TH_THRU  [TP_15TH]  53.59,138.94 0 top
TP44  TEST-POINTTP_15TH_THRU  [TP_15TH]  53.59,128.27 0 top
TP45  TEST-POINTTP_15TH_THRU  [TP_15TH]  84.07,138.94 0 top
TP46  TEST-POINTTP_15TH_THRU  [TP_15TH]  84.07,128.27 0 top
TP47  TEST-POINTTP_15TH_THRU  [TP_15TH]  114.55,138.94 0 top
TP48  TEST-POINTTP_15TH_THRU  [TP_15TH]  114.55,128.27 0 top
TP49  TEST-POINTTP_15TH_THRU  [TP_15TH]  23.11,161.8 0 top
TP50  TEST-POINTTP_15TH_THRU  [TP_15TH]  23.11,151.13 0 top
TP51  TEST-POINTTP_15TH_THRU  [TP_15TH]  53.59,161.8 0 top
TP52  TEST-POINTTP_15TH_THRU  [TP_15TH]  53.59,151.13 0 top
TP53  TEST-POINTTP_15TH_THRU  [TP_15TH]  84.07,161.8 0 top
TP54  TEST-POINTTP_15TH_THRU  [TP_15TH]  84.07,151.13 0 top
TP55  TEST-POINTTP_15TH_THRU  [TP_15TH]  114.55,161.8 0 top
TP56  TEST-POINTTP_15TH_THRU  [TP_15TH]  114.55,151.13 0 top
U1  MAX31855K  [SOIC8]  16.76,19.3 90 top
U2  MAX31855K  [SOIC8]  47.24,19.3 90 top
U3  MAX31855K  [SOIC8]  77.72,19.3 90 top
U4  MAX31855K  [SOIC8]  108.2,19.3 90 top
U5  MAX31855K  [SOIC8]  16.76,42.16 90 top
U6  MAX31855K  [SOIC8]  47.24,42.16 90 top
U7  MAX31855K  [SOIC8]  77.72,42.16 90 top
U8  MAX31855K  [SOIC8]  108.2,42.16 90 top
U9  MAX31855K  [SOIC8]  16.76,65.02 90 top
U10  MAX31855K  [SOIC8]  47.24,65.02 90 top
U11  MAX31855K  [SOIC8]  77.72,65.02 90 top
U12  MAX31855K  [SOIC8]  108.2,65.02 90 top
U13  MAX31855K  [SOIC8]  16.76,87.88 90 top
U14  MAX31855K  [SOIC8]  47.24,87.88 90 top
U15  MAX31855K  [SOIC8]  77.72,87.88 90 top
U16  MAX31855K  [SOIC8]  108.2,87.88 90 top
U17  MAX31855K  [SOIC8]  16.76,110.74 90 top
U18  MAX31855K  [SOIC8]  47.24,110.74 90 top
U19  MAX31855K  [SOIC8]  77.72,110.74 90 top
U20  MAX31855K  [SOIC8]  108.2,110.74 90 top
U21  MAX31855K  [SOIC8]  16.76,133.6 90 top
U22  MAX31855K  [SOIC8]  47.24,133.6 90 top
U23  MAX31855K  [SOIC8]  77.72,133.6 90 top
U24  MAX31855K  [SOIC8]  108.2,133.6 90 top
U25  MAX31855K  [SOIC8]  16.76,156.46 90 top
U26  MAX31855K  [SOIC8]  47.24,156.46 90 top
U27  MAX31855K  [SOIC8]  77.72,156.46 90 top
U28  MAX31855K  [SOIC8]  108.2,156.46 90 top

## Library data of the parts
C1 C3 C5 C7 C9 C11 C13 C15 C17 C19 C21 C23 C25 C27 C29 C31 C33 C35 C37 C39 C41 C43 C45 C47 C49 C51 C53 C55 = SparkFun-Capacitors; PROD_ID: CAP-00810
C2 C4 C6 C8 C10 C12 C14 C16 C18 C20 C22 C24 C26 C28 C30 C32 C34 C36 C38 C40 C42 C44 C46 C48 C50 C52 C54 C56 = SparkFun-Capacitors; PROD_ID: CAP-00867
E$1-E$4 FID1-FID56 LOGO1-LOGO112 = SparkFun-Aesthetics
E$5 E$6 = SparkFun-Retired
JP1 JP3 JP5 JP7 JP9 JP11 JP13 JP15 JP17 JP19 JP21 JP23 JP25 JP27 JP29 JP31 JP33 JP35 JP37 JP39 JP41 JP43 JP45 JP47 JP49 JP51 JP53 JP55 = SparkFun-Connectors; PROD_ID: CONN-08437
JP2 JP4 JP6 JP8 JP10 JP12 JP14 JP16 JP18 JP20 JP22 JP24 JP26 JP28 JP30 JP32 JP34 JP36 JP38 JP40 JP42 JP44 JP46 JP48 JP50 JP52 JP54 JP56 = Testing
L1-L56 = SparkFun-Passives; PROD_ID: NDUC-12579
R1-R28 = SparkFun-Resistors; PROD_ID: RES-00824
STANDOFF1-STANDOFF56 = SparkFun-Electromechanical
TP1-TP56 = SparkFun-Passives
U1-U28 = SparkFun-AnalogIC; PROD_ID: IC-12578

## Nets
GND: C1.2 JP1.1 U1.1
GND1: C3.2 JP3.1 U2.1
GND2: C5.2 JP5.1 U3.1
GND3: C7.2 JP7.1 U4.1
GND4: C9.2 JP9.1 U5.1
GND5: C11.2 JP11.1 U6.1
GND6: C13.2 JP13.1 U7.1
GND7: C15.2 JP15.1 U8.1
GND8: C17.2 JP17.1 U9.1
GND9: C19.2 JP19.1 U10.1
GND10: C21.2 JP21.1 U11.1
GND11: C23.2 JP23.1 U12.1
GND12: C25.2 JP25.1 U13.1
GND13: C27.2 JP27.1 U14.1
GND14: C29.2 JP29.1 U15.1
GND15: C31.2 JP31.1 U16.1
GND16: C33.2 JP33.1 U17.1
GND17: C35.2 JP35.1 U18.1
GND18: C37.2 JP37.1 U19.1
GND19: C39.2 JP39.1 U20.1
GND20: C41.2 JP41.1 U21.1
GND21: C43.2 JP43.1 U22.1
GND22: C45.2 JP45.1 U23.1
GND23: C47.2 JP47.1 U24.1
GND24: C49.2 JP49.1 U25.1
GND25: C51.2 JP51.1 U26.1
GND26: C53.2 JP53.1 U27.1
GND27: C55.2 JP55.1 U28.1
N$1: JP1.3 U1.5
N$2: JP1.4 U1.7
N$3: C2.2 L1.1 U1.2
N$4: JP2.+ L2.2 TP1.P$1
N$5: JP2.- L1.2 TP2.P$1
N$6: C4.1 L4.1 U2.3
N$7: C2.1 L2.1 U1.3
N$8: JP1.6 R1.1 U1.6
N$9: JP3.3 U2.5
N$10: JP3.4 U2.7
N$11: JP3.6 R2.1 U2.6
N$12: C4.2 L3.1 U2.2
N$13: JP4.- L3.2 TP4.P$1
N$14: JP4.+ L4.2 TP3.P$1
N$15: C6.1 L6.1 U3.3
N$16: JP5.3 U3.5
N$17: JP5.4 U3.7
N$18: JP5.6 R3.1 U3.6
N$19: C6.2 L5.1 U3.2
N$20: JP6.- L5.2 TP6.P$1
N$21: JP6.+ L6.2 TP5.P$1
N$22: C8.1 L8.1 U4.3
N$23: JP7.3 U4.5
N$24: JP7.4 U4.7
N$25: JP7.6 R4.1 U4.6
N$26: C8.2 L7.1 U4.2
N$27: JP8.- L7.2 TP8.P$1
N$28: JP8.+ L8.2 TP7.P$1
N$29: C10.1 L10.1 U5.3
N$30: JP9.3 U5.5
N$31: JP9.4 U5.7
N$32: JP9.6 R5.1 U5.6
N$33: C10.2 L9.1 U5.2
N$34: JP10.- L9.2 TP10.P$1
N$35: JP10.+ L10.2 TP9.P$1
N$36: C12.1 L12.1 U6.3
N$37: JP11.3 U6.5
N$38: JP11.4 U6.7
N$39: JP11.6 R6.1 U6.6
N$40: C12.2 L11.1 U6.2
N$41: JP12.- L11.2 TP12.P$1
N$42: JP12.+ L12.2 TP11.P$1
N$43: C14.1 L14.1 U7.3
N$44: JP13.3 U7.5
N$45: JP13.4 U7.7
N$46: JP13.6 R7.1 U7.6
N$47: C14.2 L13.1 U7.2
N$48: JP14.- L13.2 TP14.P$1
N$49: JP14.+ L14.2 TP13.P$1
N$50: C16.1 L16.1 U8.3
N$51: JP15.3 U8.5
N$52: JP15.4 U8.7
N$53: JP15.6 R8.1 U8.6
N$54: C16.2 L15.1 U8.2
N$55: JP16.- L15.2 TP16.P$1
N$56: JP16.+ L16.2 TP15.P$1
N$57: C18.1 L18.1 U9.3
N$58: JP17.3 U9.5
N$59: JP17.4 U9.7
N$60: JP17.6 R9.1 U9.6
N$61: C18.2 L17.1 U9.2
N$62: JP18.- L17.2 TP18.P$1
N$63: JP18.+ L18.2 TP17.P$1
N$64: C20.1 L20.1 U10.3
N$65: JP19.3 U10.5
N$66: JP19.4 U10.7
N$67: JP19.6 R10.1 U10.6
N$68: C20.2 L19.1 U10.2
N$69: JP20.- L19.2 TP20.P$1
N$70: JP20.+ L20.2 TP19.P$1
N$71: C22.1 L22.1 U11.3
N$72: JP21.3 U11.5
N$73: JP21.4 U11.7
N$74: JP21.6 R11.1 U11.6
N$75: C22.2 L21.1 U11.2
N$76: JP22.- L21.2 TP22.P$1
N$77: JP22.+ L22.2 TP21.P$1
N$78: C24.1 L24.1 U12.3
N$79: JP23.3 U12.5
N$80: JP23.4 U12.7
N$81: JP23.6 R12.1 U12.6
N$82: C24.2 L23.1 U12.2
N$83: JP24.- L23.2 TP24.P$1
N$84: JP24.+ L24.2 TP23.P$1
N$85: C26.1 L26.1 U13.3
N$86: JP25.3 U13.5
N$87: JP25.4 U13.7
N$88: JP25.6 R13.1 U13.6
N$89: C26.2 L25.1 U13.2
N$90: JP26.- L25.2 TP26.P$1
N$91: JP26.+ L26.2 TP25.P$1
N$92: C28.1 L28.1 U14.3
N$93: JP27.3 U14.5
N$94: JP27.4 U14.7
N$95: JP27.6 R14.1 U14.6
N$96: C28.2 L27.1 U14.2
N$97: JP28.- L27.2 TP28.P$1
N$98: JP28.+ L28.2 TP27.P$1
N$99: C30.1 L30.1 U15.3
N$100: JP29.3 U15.5
N$101: JP29.4 U15.7
N$102: JP29.6 R15.1 U15.6
N$103: C30.2 L29.1 U15.2
N$104: JP30.- L29.2 TP30.P$1
N$105: JP30.+ L30.2 TP29.P$1
N$106: C32.1 L32.1 U16.3
N$107: JP31.3 U16.5
N$108: JP31.4 U16.7
N$109: JP31.6 R16.1 U16.6
N$110: C32.2 L31.1 U16.2
N$111: JP32.- L31.2 TP32.P$1
N$112: JP32.+ L32.2 TP31.P$1
N$113: C34.1 L34.1 U17.3
N$114: JP33.3 U17.5
N$115: JP33.4 U17.7
N$116: JP33.6 R17.1 U17.6
N$117: C34.2 L33.1 U17.2
N$118: JP34.- L33.2 TP34.P$1
N$119: JP34.+ L34.2 TP33.P$1
N$120: C36.1 L36.1 U18.3
N$121: JP35.3 U18.5
N$122: JP35.4 U18.7
N$123: JP35.6 R18.1 U18.6
N$124: C36.2 L35.1 U18.2
N$125: JP36.- L35.2 TP36.P$1
N$126: JP36.+ L36.2 TP35.P$1
N$127: C38.1 L38.1 U19.3
N$128: JP37.3 U19.5
N$129: JP37.4 U19.7
N$130: JP37.6 R19.1 U19.6
N$131: C38.2 L37.1 U19.2
N$132: JP38.- L37.2 TP38.P$1
N$133: JP38.+ L38.2 TP37.P$1
N$134: C40.1 L40.1 U20.3
N$135: JP39.3 U20.5
N$136: JP39.4 U20.7
N$137: JP39.6 R20.1 U20.6
N$138: C40.2 L39.1 U20.2
N$139: JP40.- L39.2 TP40.P$1
N$140: JP40.+ L40.2 TP39.P$1
N$141: C42.1 L42.1 U21.3
N$142: JP41.3 U21.5
N$143: JP41.4 U21.7
N$144: JP41.6 R21.1 U21.6
N$145: C42.2 L41.1 U21.2
N$146: JP42.- L41.2 TP42.P$1
N$147: JP42.+ L42.2 TP41.P$1
N$148: C44.1 L44.1 U22.3
N$149: JP43.3 U22.5
N$150: JP43.4 U22.7
N$151: JP43.6 R22.1 U22.6
N$152: C44.2 L43.1 U22.2
N$153: JP44.- L43.2 TP44.P$1
N$154: JP44.+ L44.2 TP43.P$1
N$155: C46.1 L46.1 U23.3
N$156: JP45.3 U23.5
N$157: JP45.4 U23.7
N$158: JP45.6 R23.1 U23.6
N$159: C46.2 L45.1 U23.2
N$160: JP46.- L45.2 TP46.P$1
N$161: JP46.+ L46.2 TP45.P$1
N$162: C48.1 L48.1 U24.3
N$163: JP47.3 U24.5
N$164: JP47.4 U24.7
N$165: JP47.6 R24.1 U24.6
N$166: C48.2 L47.1 U24.2
N$167: JP48.- L47.2 TP48.P$1
N$168: JP48.+ L48.2 TP47.P$1
N$169: C50.1 L50.1 U25.3
N$170: JP49.3 U25.5
N$171: JP49.4 U25.7
N$172: JP49.6 R25.1 U25.6
N$173: C50.2 L49.1 U25.2
N$174: JP50.- L49.2 TP50.P$1
N$175: JP50.+ L50.2 TP49.P$1
N$176: C52.1 L52.1 U26.3
N$177: JP51.3 U26.5
N$178: JP51.4 U26.7
N$179: JP51.6 R26.1 U26.6
N$180: C52.2 L51.1 U26.2
N$181: JP52.- L51.2 TP52.P$1
N$182: JP52.+ L52.2 TP51.P$1
N$183: C54.1 L54.1 U27.3
N$184: JP53.3 U27.5
N$185: JP53.4 U27.7
N$186: JP53.6 R27.1 U27.6
N$187: C54.2 L53.1 U27.2
N$188: JP54.- L53.2 TP54.P$1
N$189: JP54.+ L54.2 TP53.P$1
N$190: C56.1 L56.1 U28.3
N$191: JP55.3 U28.5
N$192: JP55.4 U28.7
N$193: JP55.6 R28.1 U28.6
N$194: C56.2 L55.1 U28.2
N$195: JP56.- L55.2 TP56.P$1
N$196: JP56.+ L56.2 TP55.P$1
VCC: C1.1 JP1.2 R1.2 U1.4
VCC1: C3.1 JP3.2 R2.2 U2.4
VCC2: C5.1 JP5.2 R3.2 U3.4
VCC3: C7.1 JP7.2 R4.2 U4.4
VCC4: C9.1 JP9.2 R5.2 U5.4
VCC5: C11.1 JP11.2 R6.2 U6.4
VCC6: C13.1 JP13.2 R7.2 U7.4
VCC7: C15.1 JP15.2 R8.2 U8.4
VCC8: C17.1 JP17.2 R9.2 U9.4
VCC9: C19.1 JP19.2 R10.2 U10.4
VCC10: C21.1 JP21.2 R11.2 U11.4
VCC11: C23.1 JP23.2 R12.2 U12.4
VCC12: C25.1 JP25.2 R13.2 U13.4
VCC13: C27.1 JP27.2 R14.2 U14.4
VCC14: C29.1 JP29.2 R15.2 U15.4
VCC15: C31.1 JP31.2 R16.2 U16.4
VCC16: C33.1 JP33.2 R17.2 U17.4
VCC17: C35.1 JP35.2 R18.2 U18.4
VCC18: C37.1 JP37.2 R19.2 U19.4
VCC19: C39.1 JP39.2 R20.2 U20.4
VCC20: C41.1 JP41.2 R21.2 U21.4
VCC21: C43.1 JP43.2 R22.2 U22.4
VCC22: C45.1 JP45.2 R23.2 U23.4
VCC23: C47.1 JP47.2 R24.2 U24.4
VCC24: C49.1 JP49.2 R25.2 U25.4
VCC25: C51.1 JP51.2 R26.2 U26.4
VCC26: C53.1 JP53.2 R27.2 U27.4
VCC27: C55.1 JP55.2 R28.2 U28.4